# EAGLE board Automatic Irrigation (EAGLE 9.7.0)

Size 266.83 x 121.93 mm. Coordinates in mm from the lower left corner, seen from the top.
Outline: 0,0 266.83,0 266.83,121.93 0,121.93 0,0
Copper layers (1*16): Top 0.035mm / dielectric 1.5mm / Bottom 0.035mm
Design rules "default": minimum track width 6mil, minimum drill 0.35mm, track to track 6mil, track to pad 6mil, pad to pad 6mil, via to via 6mil, smd to smd 6mil, copper to edge 40mil, drill to drill 6mil, minimum pad ring 10mil, minimum via ring 8mil, stop-mask expansion 4mil, vias tented up to drill 0mil, thermal gap 10mil

## Footprints (pad centres in the part's own frame; a part is rotated, then mirrored left to right if it is on the bottom)
LEDRD254W60D565H860B_B = drill 0.981 pad 1.581: 1 -1.27,0; 2 1.27,0
LEDRD254W60D565H860B_G = drill 0.981 pad 1.581: 1 -1.27,0; 2 1.27,0
LEDRD254W60D565H860B = drill 0.981 pad 1.581: 1 -1.27,0; 2 1.27,0
LEDRD254W60D565H860B_O = drill 0.981 pad 1.581: 1 -1.27,0; 2 1.27,0
LEDRD254W60D565H860B_Y = drill 0.981 pad 1.581: 1 -1.27,0; 2 1.27,0
LEDRD254W60D565H860B_W = drill 0.981 pad 1.581: 1 -1.27,0; 2 1.27,0
PIEZO = drill 1 pad 1.6: 1 -3.5,0; 2 3.5,0
GL5528 = drill 0.8 pad 1.4: 1 -1.702,0; 2 1.702,0
RESAD1016W63L850D250B = drill 0.83 pad 1.43: 1 -5.08,0; 2 5.08,0
SEN-13322 = drill 1.016 long: 1 -2.54,0; 2 0,0; 3 2.54,0
SM-S2309S = drill 1.016 long: 1 -2.54,0; 2 0,0; 3 2.54,0
78F01T = drill 0.8: 1 -1.27,-3.81; 2 1.27,-3.81; 3 1.27,3.81; 4 -1.27,3.81
ARDUINO-UNO-R3-SHIELD = drill 1.016 pad 1.88: 3.3V 24.13,-2.54; 5V 24.13,0; A0 24.13,12.7; A1 24.13,15.24; A2 24.13,17.78; A3 24.13,20.32; A4 24.13,22.86; A5 24.13,25.4; AREF -24.13,-13.97; D2 -24.13,20.32; D3 -24.13,17.78; D4 -24.13,15.24; D5 -24.13,12.7; D6 -24.13,10.16; D7 -24.13,7.62; D8 -24.13,3.81; D9 -24.13,1.27; D10 -24.13,-1.27; D11 -24.13,-3.81; D12 -24.13,-6.35; D13 -24.13,-8.89; GND@0 24.13,2.54; GND@1 24.13,5.08; GND@2 -24.13,-11.43; IOREF 24.13,-7.62; NC 24.13,-10.16; RES 24.13,-5.08; RX -24.13,25.4; SCL -24.13,-19.05; SDA -24.13,-16.51; TX -24.13,22.86; VIN 24.13,7.62
LCD-I2C = drill 1.016 long: 1 -19.05,-5.08; 2 -19.05,-7.62; 3 -19.05,-10.16; 4 -19.05,-12.7
TO92 = drill 0.813 octagon: 1 -1.27,0; 2 0,1.905; 3 1.27,0

## Placement (x,y rotation side)
D1  BLUE  [LEDRD254W60D565H860B_B]  113.96,99.78 180 top
D2  GREEN  [LEDRD254W60D565H860B_G]  119.04,99.78 180 top
D3  RED  [LEDRD254W60D565H860B]  124.12,99.78 180 top
D4  ORANGE  [LEDRD254W60D565H860B_O]  96.18,99.78 180 top
D5  YELLOW  [LEDRD254W60D565H860B_Y]  101.26,99.78 180 top
D6  WHITE  [LEDRD254W60D565H860B_W]  106.34,99.78 180 top
PIEZO1  PIEZO  [PIEZO]  49.78,81.37 0 top
R1  PHOTOCELL_GL5528  [GL5528]  106.34,76.92 0 top
R2  1k  [RESAD1016W63L850D250B]  105.07,69.3 90 top
R3  1k  [RESAD1016W63L850D250B]  33.93,80.71 0 top
R4  1k  [RESAD1016W63L850D250B]  33.93,78 0 top
R5  1k  [RESAD1016W63L850D250B]  107.61,92.16 90 top
R6  1k  [RESAD1016W63L850D250B]  102.53,92.16 90 top
R7  1k  [RESAD1016W63L850D250B]  97.45,92.16 90 top
R8  1k  [RESAD1016W63L850D250B]  115.23,92.16 90 top
R9  1k  [RESAD1016W63L850D250B]  120.31,92.16 90 top
R10  1k  [RESAD1016W63L850D250B]  125.39,92.16 90 top
SEN1  SEN-13322  [SEN-13322]  228.76,58.07 0 top
SEN2  SEN-13322  [SEN-13322]  259.84,57.06 0 top
SERVO1  SERVOSM-S2309S  [SM-S2309S]  177.66,26.97 0 top
SERVO2  SERVOSM-S2309S  [SM-S2309S]  201.09,26.29 0 top
SW1  DPST78F01T  [78F01T]  19.32,72.84 180 top
SW2  DPST78F01T  [78F01T]  6.99,72.9 180 top
U1  ARDUINO-UNO-R3-SHIELD  [ARDUINO-UNO-R3-SHIELD]  108.88,29.84 270 top
U2  LCD-16X2-I2CSUNFOUNDER-IIC  [LCD-I2C]  193.41,114.39 0 top
U3  TMP36GT9Z_TO92  [TO92]  115.23,76.92 0 top

## Library data of the parts
D1 = Tinkercad; CATEGORY: Opto-Electronic; SUB-CATEGORY: LED; VALUE: LED_BLUE
D2 = Tinkercad; CATEGORY: Opto-Electronic; SUB-CATEGORY: LED; VALUE: LED_GREEN
D3 = Tinkercad; CATEGORY: Opto-Electronic; SUB-CATEGORY: LED; VALUE: LED_RED
D4 = Tinkercad; CATEGORY: Opto-Electronic; SUB-CATEGORY: LED; VALUE: LED_ORANGE
D5 = Tinkercad; CATEGORY: Opto-Electronic; SUB-CATEGORY: LED; VALUE: LED_YELLOW
D6 = Tinkercad; CATEGORY: Opto-Electronic; SUB-CATEGORY: LED; VALUE: LED_WHITE
PIEZO1 R1-R10 SEN1 SEN2 SERVO1 SERVO2 SW1 SW2 U1-U3 = Tinkercad

## Nets
D1_A: D1.1 R8.2
D2_A: D2.1 R9.2
D3_A: D3.1 R10.2
D4_A: D4.1 R7.2
D5_A: D5.1 R6.2
D6_A: D6.1 R5.2
U1_5V: R1.2 SEN1.1 SEN2.1 SERVO1.1 SERVO2.1 SW1.1 SW2.1 U1.5V U2.2 U3.3
U1_A0: SEN1.3 U1.A0
U1_A1: R1.1 R2.2 U1.A1
U1_A2: U1.A2 U3.2
U1_A4: SEN2.3 U1.A4
U1_D2: R8.1 U1.D2
U1_D3: SERVO1.2 U1.D3
U1_D4: R9.1 U1.D4
U1_D5: PIEZO1.1 U1.D5
U1_D6: SERVO2.2 U1.D6
U1_D7: R10.1 U1.D7
U1_D8: R5.1 U1.D8
U1_D9: R6.1 U1.D9
U1_D10: R7.1 U1.D10
U1_D12: R3.1 SW2.4 U1.D12
U1_D13: R4.1 SW1.4 U1.D13
U1_GND: D1.2 D2.2 D3.2 D4.2 D5.2 D6.2 PIEZO1.2 R2.1 R3.2 R4.2 SEN1.2 SEN2.2 SERVO1.3 SERVO2.3 SW1.2 SW2.2 U1.GND@0 U1.GND@1 U1.GND@2 U2.1 U3.1
U1_SCL: U1.SCL U2.4
U1_SDA: U1.SDA U2.3

## Tracks (layer width: path | path; a pad name or v marks a point on that pad's centre or on a via)
D1_A  (1 unrouted)
D2_A  (1 unrouted)
D3_A  (1 unrouted)
D4_A  (1 unrouted)
D5_A  (1 unrouted)
D6_A  (1 unrouted)
U1_5V  (9 unrouted)
U1_A0  (1 unrouted)
U1_A1  (2 unrouted)
U1_A2  (1 unrouted)
U1_A4  (1 unrouted)
U1_D2  (1 unrouted)
U1_D3  (1 unrouted)
U1_D4  (1 unrouted)
U1_D5  (1 unrouted)
U1_D6  (1 unrouted)
U1_D7  (1 unrouted)
U1_D8  (1 unrouted)
U1_D9  (1 unrouted)
U1_D10  (1 unrouted)
U1_D12  (2 unrouted)
U1_D13  (2 unrouted)
U1_GND  (20 unrouted)
U1_SCL  (1 unrouted)
U1_SDA  (1 unrouted)